# Altium PCB HCHO_Benchmark_B1.PcbDoc
Units mm, origin at the board's own origin, x right, y up, seen from the top; angles counter-clockwise.
Board outline 75.3 x 69.27 mm, 2 copper layers (Top Layer, Bottom Layer); 48 components, 50 nets, 181 pads, 116 vias.
Unrouted connection lines stored in the file: 2.
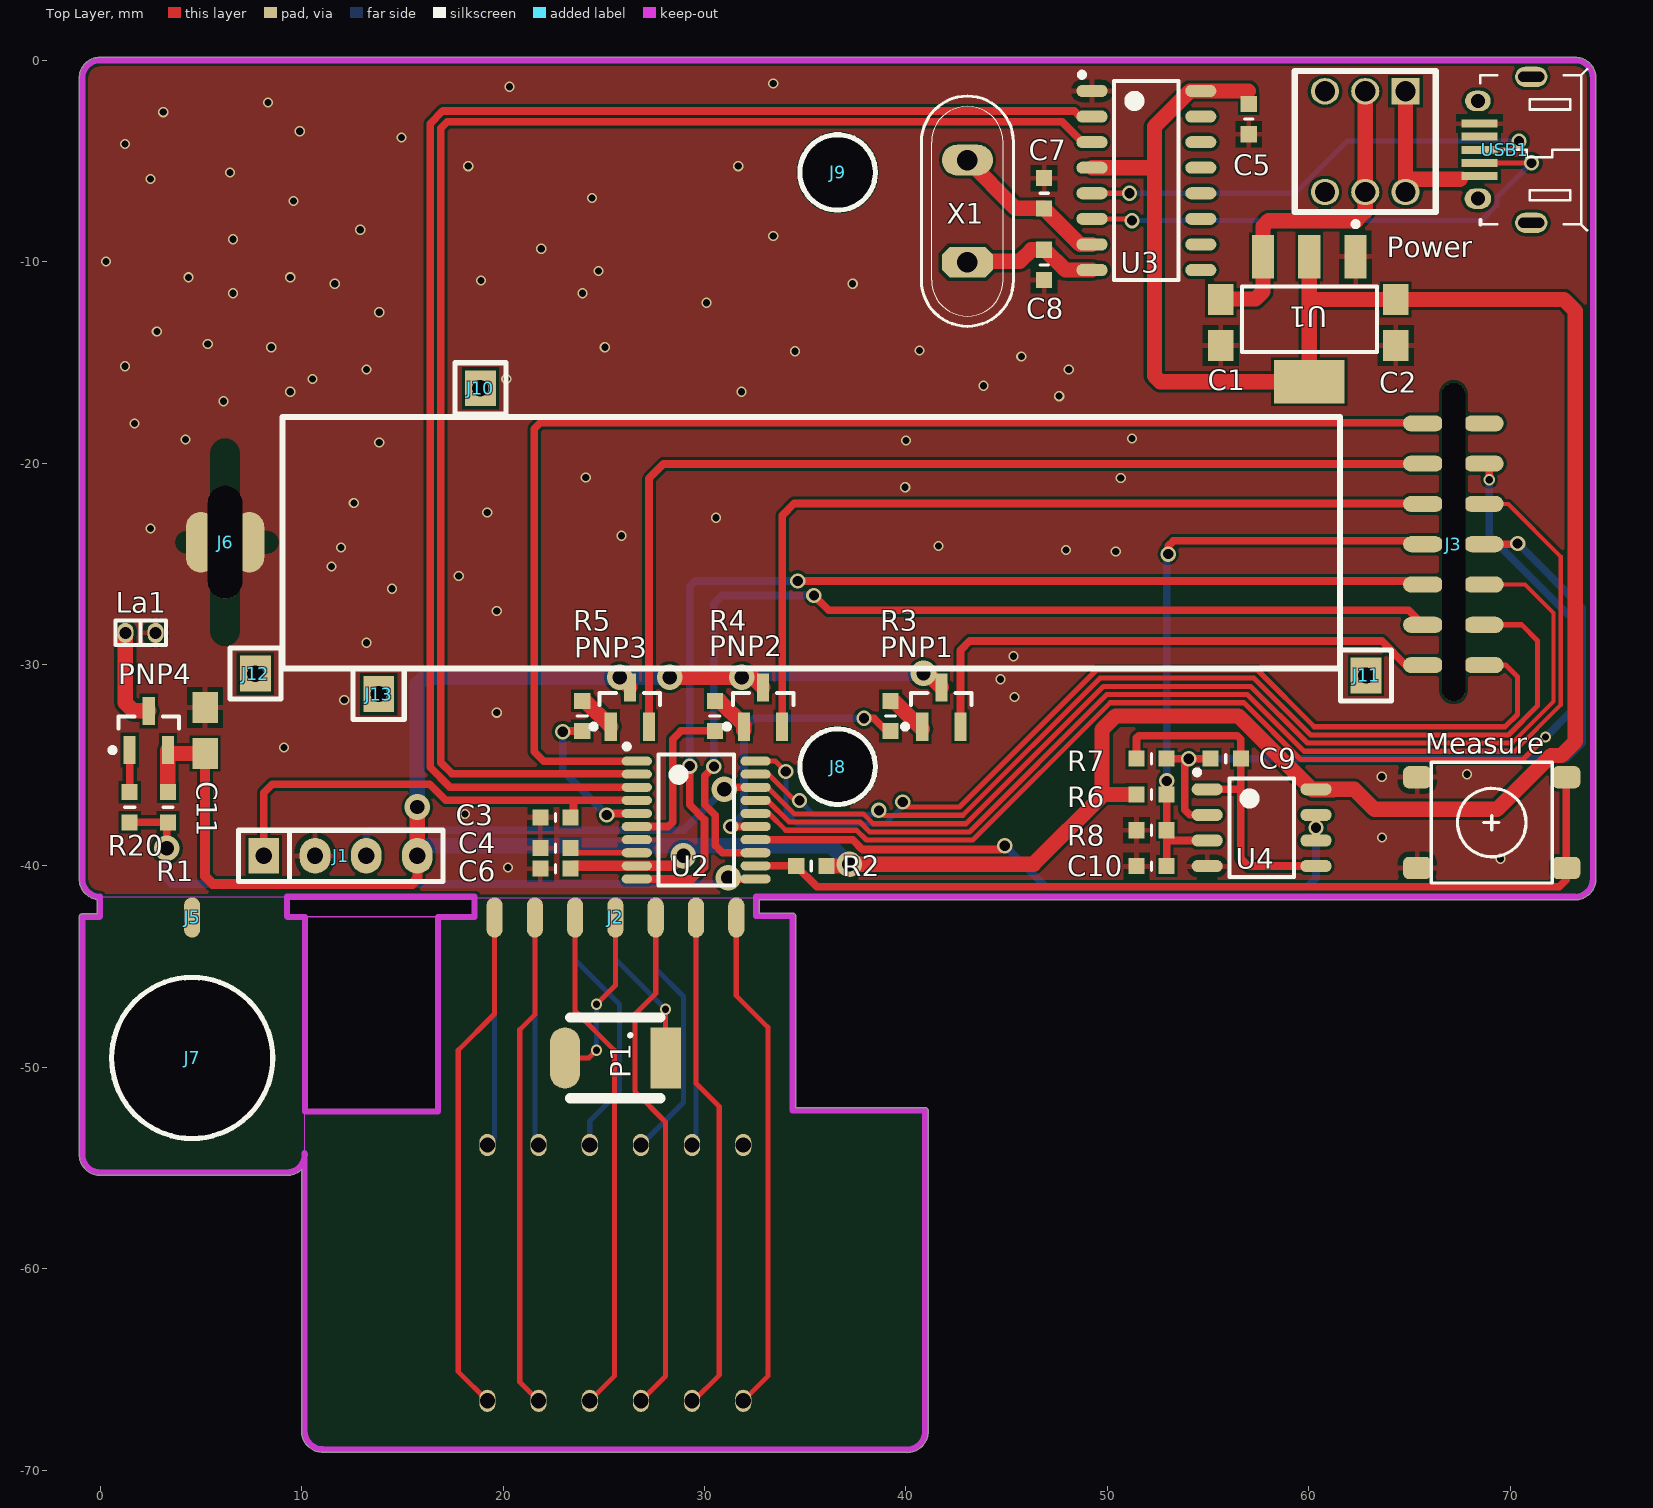
[diagram p0: Top Layer view]
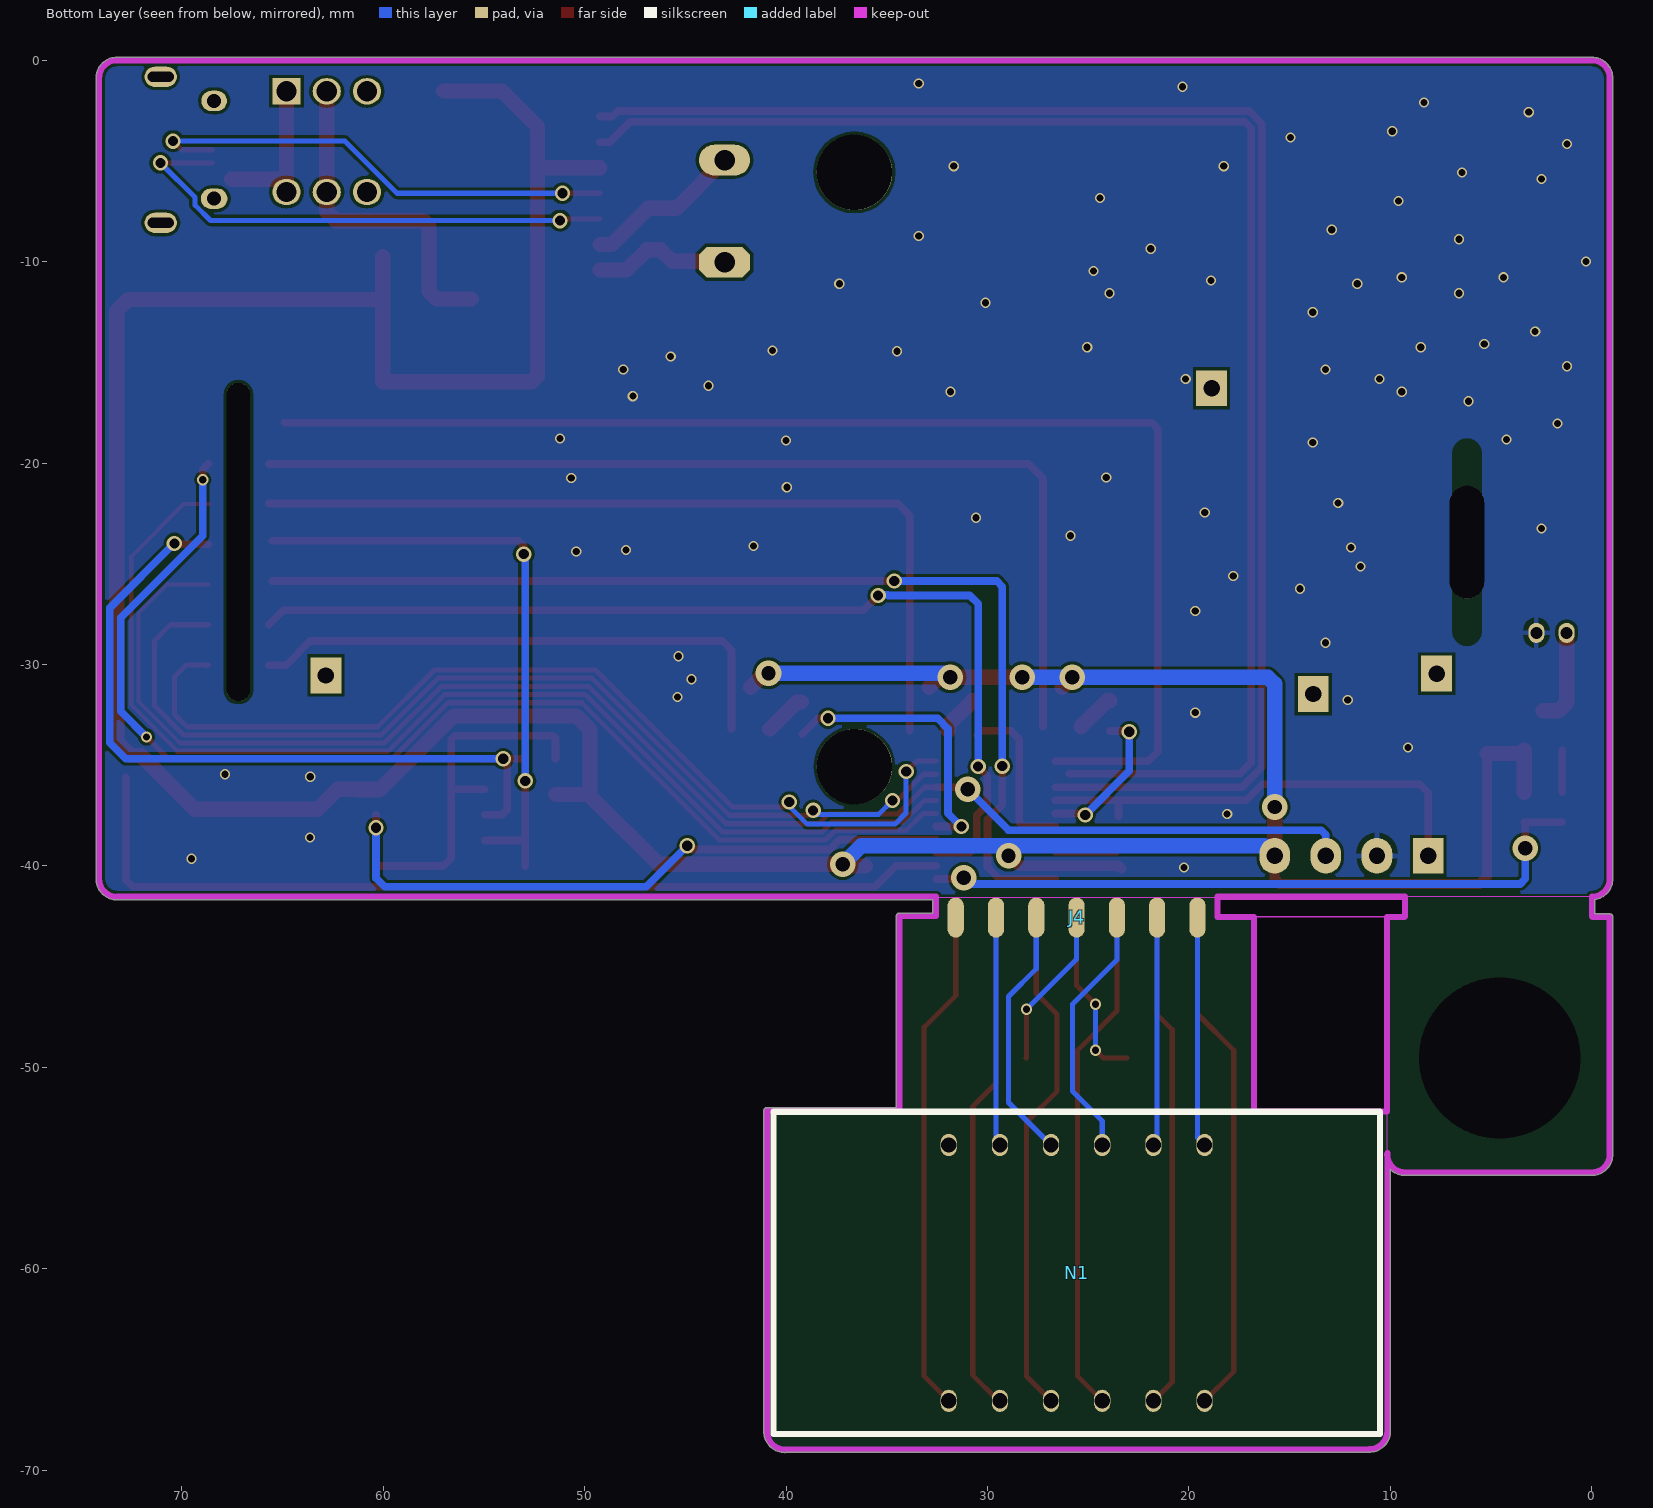
[diagram p1: Bottom Layer view, seen from below]

## Layer stack, top to bottom
Top Layer: signal copper 0.0356
Dielectric: dielectric 0.32, FR-4, Dk 4.8
Bottom Layer: signal copper 0.0356

## Board outline
-1.039,-54.322 -1.039,-42.532 cw(c-0.889,-42.532) -0.995,-42.425 cw(c-0.889,-42.531) -0.889,-42.381 -0.15,-42.381 -0.15,-41.668 cw(c0,-40.64) -1.039,-40.64 -1.039,-0.929 cw(c-0.889,-0.929) -1.038,-0.909 cw(c-0.889,-0.889) -1.039,-0.889 cw(c0,-0.889) 0,0.15 cw(c0,0) 0.02,0.149 cw(c0.04,0) 0.04,0.15 73.222,0.15 cw(c73.222,-0.889) 74.261,-0.889 cw(c74.111,-0.889) 74.261,-0.89 74.261,-40.64 cw(c73.222,-40.64) 73.222,-41.679 32.711,-41.679 32.711,-42.343 34.378,-42.343 cw(c34.378,-42.494) 34.528,-42.494 34.528,-51.995 40.954,-51.995 cw(c40.954,-52.145) 41.104,-52.145 41.104,-68.16 cw(c40.954,-68.16) 41.095,-68.213 cw(c40.064,-68.081) 40.064,-69.12 cw(c40.064,-68.97) 40.022,-69.115 11.041,-69.115 cw(c11.041,-68.964) 10.98,-69.102 cw(c11.041,-68.064) 10.002,-68.064 9.999,-55.063 cw(c9.269,-54.323) 9.269,-55.362 cw(c9.269,-55.212) 9.251,-55.361 0,-55.361 cw(c0,-54.322)
cut-out: 18.591,-41.529 18.591,-42.532 9.271,-42.532 9.271,-41.529
cut-out: 16.777,-42.531 16.777,-52.235 10.159,-52.235 10.159,-42.532 10.16,-42.531

## Design rules (kind name [scope] priority, off if disabled: settings)
Clearance "6mil Special" [(HasFootprint('FPC 0.5mm 4P') OR HasFootprint('FPC 0.5mm 16P') OR HasFootprint('QFN40P500X500X90_HS-41L'))] p1: gap=0.152
Clearance "8mil all" [All] p2: gap=0.152
ComponentClearance [All] p1: gap=-100 collisioncheckmode=3 verticalgap=0.254 showdistances=FALSE
Height [All] p1: minheight=0 maxheight=50.8 prefheight=12.7
HoleSize [All] p1: absolutevalues=TRUE maxlimit=1817.048 minlimit=0 maxpercent=80.000 minpercent=20.000
HoleToHoleClearance [All] p1: gap=0.203 allowstackedmicrovias=TRUE
MinimumSolderMaskSliver [All] p1: minsoldermaskwidth=0
PolygonConnect PolygonConnect_1 [isvia] p1: connectstyle=Direct reliefconductorwidth=0.254 reliefentries=4 polygonreliefangle="90 Angle" airgapwidth=0.254
PolygonConnect [All] p2: connectstyle=Relief reliefconductorwidth=0.254 reliefentries=4 polygonreliefangle="90 Angle" airgapwidth=0.254
RoutingCorners [All] p1: cornerstyle=45-Degree minsetback=0.254 maxsetback=2.54
RoutingVias [All] p1: holewidth=0.356 width=0.508 viastyle="Through Hole" minholewidth=0.356 minwidth=0.508 maxholewidth=2.54 maxwidth=5.08
SilkToSilkClearance [All] p1: silktosilkclearance=0
SilkToSolderMaskClearance [IsPad] p1: minsilkscreentomaskgap=0 clearancetoexposedcopper=TRUE
SolderMaskExpansion [All] p1: expansion=0.102
Width 20mil_Power [(InNet('EP_SUPPLY&VBAT') OR InNet('PSUPPLY') OR InNet('P_3.3V') OR InNet('PSUPPLYBAT') OR InNet('P_3.3V') OR InNet('P_5V'))] p1: maxlimit=1000 minlimit=0.203 preferedwidth=0.508
Width 8mil_Basic [All] p2: maxlimit=100 minlimit=0.203 preferedwidth=0.254
20 further rules are at their usual default settings.

## Components (designator, comment, footprint, x,y, rotation, side; value= is the part's Value field where it differs from the comment)
C1 "10uf" C0805 55.632,-13.019 r270 top
C2 "10uf" C0805 64.319,-13.019 r270 top
C3 "1uf" C0603 22.606,-37.592 r0 top
C4 "1uf" C0603 22.606,-39.116 r0 top
C5 "1uf" C0603 57.023,-2.921 r270 top
C6 "1uf" C0603 22.606,-40.132 r180 top
C7 "12pf" C0603 46.863,-6.604 r90 top
C8 "12pf" C0603 46.863,-10.16 r270 top
C9 "1uf" C0603 55.88,-34.671 r180 top
C10 "10uf" C0603 52.197,-40.005 r180 top
C11 "10uf" C0805 5.207,-33.274 r90 top
J1 "CON4" CON4 11.938,-39.497 r0 top
J2 "CON7_PCB" CON7_PCB 25.58,-42.555 r180 top
J3 "Con7x2_PCB" Con7x2_PCB 67.182,-23.927 r90 top
J4 "CON7_PCB" CON7_PCB 25.58,-42.555 r0 bottom
J5 "CON1_PCB" CON1_PCB 4.168,-42.555 r0 top
J6 "CON1X2_PCB" CON1X2_PCB 6.199,-23.927 r90 top
J7 "CON1" 6.6mm 4.572,-49.53 r0 top
J8 "CON1" 3.75mm 36.611,-35.07 r0 top
J9 "CON1" 3.75mm 36.611,-5.57 r0 top
J10 "CON1" CON1 18.878,-16.286 r0 top
J11 "CON1" CON1 62.847,-30.541 r0 top
J12 "CON1" CON1 7.707,-30.448 r0 top
J13 "CON1" CON1 13.828,-31.465 r0 top
La1 "Laser" Battry_Connector 1.253,-28.426 r0 top (schematic designator Laser1)
Measure "Patch_6x6x5" PATCH6X6X5 69.088,-37.846 r180 top
N1 "FJ4301BH" FJ4301BH 25.576,-60.201 r0 bottom
P1 "photodetector" BPW34 25.576,-49.532 r180 top
PNP1 "8550" SOT23-3 41.761,-32.109 r90 top
PNP2 "8550" SOT23-3 32.909,-32.109 r90 top
PNP3 "8550" SOT23-3 26.299,-32.109 r90 top
PNP4 "8550" SOT23-3 2.413,-33.274 r90 top
Power "SW_7x7mm" SW_7x7mm 62.806,-4.041 r180 top
R1 "10K" R0603 3.363,-37.084 r90 top
R2 "10K" R0603 35.306,-40.005 r0 top
R3 "10K" R0603 39.236,-32.553 r270 top
R4 "10K" R0603 30.518,-32.553 r270 top
R5 "10K" R0603 23.932,-32.553 r270 top
R6 "4K7" R0603 52.197,-36.449 r180 top
R7 "10M" R0603 52.197,-34.671 r180 top
R8 "1K" R0603 52.197,-38.227 r0 top
R20 "1K" R0603 1.463,-37.084 r270 top
U1 "1117-3.3" SOT223 60.029,-12.86 r180 top
U2 "STM8S003F3P6" STM8S003F3P6 29.591,-37.719 r0 top
U3 "CH340G" SOP-16 51.943,-5.969 r0 top
U4 "LMV358" LMV358_SOP 57.658,-38.1 r0 top
USB1 "MicroUSB" MicroUSB 69.723,-4.445 r180 top
X1 "12MHZ" HC-49 43.053,-7.493 r90 top

## Footprints (in the part's own frame and the unit in brackets; to place one, negate y for a bottom-side part, rotate by r counter-clockwise, add the part's x,y. Pads: shape width x height; smd on the part's side, far side on the other; paste and mask are expansions set on the pad)
3.75mm [mm]
  round 3.75 hole 3.75 unplated: ""(0,0)
6.6mm [mm]
  round 6.6 hole 8 unplated: ""(0,0)
Battry_Connector [mm]
  oval 0.8x1 hole 0.6: 1(0,0) 2(1.5,0)
  silkscreen extent -0.5,-0.61 2.02,0.61
BPW34 [mm]
  rect 1.5x3.048 smd: A(-2.5,0)
  oval 1.5x3.048 smd: C(2.5,0)
  silkscreen extent -2.25,-2 2.25,2
C0603 [mm]
  rect 0.8x0.8 smd: 1(-0.75,0) 2(0.75,0)
  silkscreen extent 0,-0.2 0,0.2, body extent -0.8,-0.4 0.8,0.4, height 0.8
C0805 [mil]
  rect 60x50 smd: 1(-45,0) 2(45,0)
  body extent -52,-25 55,25, height 31
CON1 [mil]
  rect 60x70 hole 32: 1(0,0)
  silkscreen extent -50,-50 50,50, body extent -51,-50 52,50, height 295
CON1_PCB [mm]
  oval 0.8x2 smd: 1(0.397,0)
CON1X2_PCB [mm]
  oval 5.6x1.7 hole 1.7 slot 5.6 at 0 deg unplated: 0(0,0)
  oval 3x1.5 smd: 1(0,1.2) 2(0,-1.2)
CON4 [mil]
  rect 60x70 hole 32: 1(-150,0)
  oval 60x70 hole 32: 2(-50,0) 3(50,0) 4(150,0)
  silkscreen extent -200,-50 200,50, body extent -201,-50 199,50, height 295
CON7_PCB [mm]
  oval 0.8x2 smd: 1(-6,0) 2(-4,0) 3(-2,0) 4(0,0) 5(2,0) 6(4,0) 7(6,0)
Con7x2_PCB [mm]
  oval 0.8x2 smd: 1(-6.1,1.5) 2(-4.1,1.5) 3(-2.1,1.5) 4(-0.1,1.5) 5(1.9,1.5) 6(3.9,1.5) 7(5.9,1.5) 8(5.9,-1.5) 9(3.9,-1.5) 10(1.9,-1.5) 11(-0.1,-1.5) 12(-2.1,-1.5) 13(-4.1,-1.5) 14(-6.1,-1.5)
  oval 15.8x1.15 hole 1.15 slot 15.8 at 0 deg unplated: ""(0.003,-0.012)
FJ4301BH [mm]
  oval 0.8x1.1 hole 0.75: 1(-6.35,-6.35) 2(-3.81,-6.35) 3(-1.27,-6.35) 4(1.27,-6.35) 5(3.81,-6.35) 6(6.35,-6.35) 7(6.35,6.35) 8(3.81,6.35) 9(1.27,6.35) 10(-1.27,6.35) 11(-3.81,6.35) 12(-6.35,6.35)
  silkscreen extent -15.05,-8 15.05,8, body extent -15.05,-8 15.05,8, height 15.1
HC-49 [mil]
  oct 60x100 hole 40: 1(-100,0)
  oval 60x100 hole 40: 2(100,0)
  silkscreen extent -225,-90 225,90, body extent -224,-91 226,89, height 134
LMV358_SOP [mm] "TSOP, 8-Leads, Body 3.00x3.00mm, Pitch 0.65mm, IPC Medium Density"
  oval 1.55x0.6 smd: 1(-2.7,1.905) 2(-2.7,0.635) 3(-2.7,-0.635) 4(-2.7,-1.905) 5(2.7,-1.905) 6(2.7,-0.635) 7(2.7,0.635) 8(2.7,1.905)
  silkscreen extent -3.32,-2.45 1.6,2.87, body extent -1.95,-2.47 1.93,2.46, height 1.1
MicroUSB [mm]
  oval 1.6x1 hole 0.5 slot 1.3 at 0 deg unplated: 0(-1.325,3.625) 0(-1.325,-3.625)
  rect 1.8x0.4 smd: 1(1.25,1.3) 2(1.25,0.65) 3(1.25,0) 4(1.25,-0.65) 5(1.25,-1.3)
  oval 1.321x1.016 hole 0.7 unplated: ""(1.325,2.425)
  oval 1.27x1.016 hole 0.7 unplated: ""(1.325,-2.425)
  silkscreen extent -4.1,-4 1.2,4, body extent -3.62,-3.96 1.81,4.02, height 2.99
PATCH6X6X5 [mm]
  rrect50% 1.4x1.1 smd: 1(-3.7,2.25) 2(3.7,2.25) 3(3.7,-2.25) 4(-3.7,-2.25)
  silkscreen extent -3,-3 3,3, body extent -4.13,-3 4.13,3, height 5
R0603 [mm]
  rect 0.8x0.8 smd: 1(-0.75,0) 2(0.75,0)
  silkscreen extent 0,-0.25 0,0.25, body extent -0.8,-0.4 0.8,0.4, height 0.5
SOP-16 [mm]
  oval 1.55x0.6 smd: 1(-2.7,4.445) 2(-2.7,3.175) 3(-2.7,1.905) 4(-2.7,0.635) 5(-2.7,-0.635) 6(-2.7,-1.905) 7(-2.7,-3.175) 8(-2.7,-4.445) 9(2.7,-4.445) 10(2.7,-3.175) 11(2.7,-1.905) 12(2.7,-0.635) 13(2.7,0.635) 14(2.7,1.905) 15(2.7,3.175) 16(2.7,4.445)
  silkscreen extent -3.32,-4.95 1.6,5.37, body extent -1.91,-4.95 1.91,4.95, height 1
SOT23-3 [mm]
  rect 1.4x0.6 smd: 1(-0.975,0.95) 2(-0.975,-0.95) 3(0.975,0)
  silkscreen extent -1.1,-1.5 0.7,1.92, body extent -0.7,-1.5 0.7,1.5, height 1
SOT223 [mm]
  rect 1.1x2.15 smd: 1(-2.3,-3.1) 2(0,-3.1) 3(2.3,-3.1)
  rect 3.5x2.15 smd: 4(0,3.1)
  silkscreen extent -3.35,-4.85 3.35,1.63, body extent -3.3,-3.2 3.3,3.1, height 1.7
STM8S003F3P6 [mm]
  oval 1.5x0.45 smd: 1(-2.95,2.925) 2(-2.95,2.275) 3(-2.95,1.625) 4(-2.95,0.975) 5(-2.95,0.325) 6(-2.95,-0.325) 7(-2.95,-0.975) 8(-2.95,-1.625) 9(-2.95,-2.275) 10(-2.95,-2.925) 11(2.95,-2.925) 12(2.95,-2.275) 13(2.95,-1.625) 14(2.95,-0.975) 15(2.95,-0.325) 16(2.95,0.325) 17(2.95,0.975) 18(2.95,1.625) 19(2.95,2.275) 20(2.95,2.925)
  silkscreen extent -3.57,-3.25 1.88,3.77, body extent -2.22,-3.25 2.2,3.24, height 1.2
SW_7x7mm [mm]
  rect 1.4x1.3 hole 1: 1(-2,-2.5)
  oval 1.4x1.3 hole 1: 2(0,-2.5) 3(2,-2.5) 4(2,2.5) 5(0,2.5) 6(-2,2.5)
  silkscreen extent -3.5,-3.5 3.5,3.5, body extent -3.54,-3.49 3.51,3.52, height 12.5

## Part data
C1 C2 C3 C4 C5 C6 C7 C8 C9 C10 C11: library part C
J3: library part CON7x2_PCB
PNP1 PNP2 PNP3 PNP4: library part PNP
R1 R2 R3 R4 R5 R6 R7 R8 R20: library part R
U1: library part 1117
X1: library part CRYSTAL

## Via types
v1: diameter 0.508, hole 0.356, Top Layer to Bottom Layer, 79 vias
v2: diameter 0.762, hole 0.508, Top Layer to Bottom Layer, 22 vias
v3: diameter 1.27, hole 0.711, Top Layer to Bottom Layer, 10 vias
v4: diameter 0.559, hole 0.356, Top Layer to Bottom Layer, 5 vias

## Nets (pads, with @x,y where several pads share a name; then routed paths per layer and width w, separated by ;. In a path a pad name is that pad's centre, name@x,y a point inside that pad or via, vN(x,y) a via of type N, cw(c..) or ccw(c..) an arc to the next point about the centre after c; other vN are vias at no path point)
-INA: C9.2 J3.11 R7.1 U4.2 | length 39.1
  Top Layer w0.381: R7.1 v2@53.848,-34.671 ; v2(54.043,-34.679) v2@53.84,-34.679 ; U4.2 54.102,-37.465 53.84,-37.203 v2@53.84,-34.679 ; C9.2 v2@53.848,-34.671 ; J3.11 70.355,-24.027 v2@70.37,-24.042 ; v2(70.37,-23.988) v2@70.37,-24.042 ; v2@70.47,-24.142 v2@70.37,-24.042 ; v2@53.84,-34.679 v2@53.848,-34.671
  Bottom Layer w0.381: v2(54.043,-34.679) 72.783,-34.679 73.574,-33.888 73.574,-27.193 v2(70.37,-23.988)
C_LASER: R1.1 R20.2 U2.11 | length 34.2
  Top Layer w0.381: R20.2 R1.1 3.302,-37.895 v3(3.302,-39.116) ; v3(31.182,-40.592) 31.234,-40.644 U2.11
  Bottom Layer w0.381: v3(3.302,-39.116) 3.302,-40.64 3.556,-40.894 30.879,-40.894 v3(31.182,-40.592)
GND: C1.2 C2.2 C3.1 C4.1 C5.2 C6.2 C7.2 C8.2 C10.2 C11.2 J1.2 La1.2 Measure.3 Measure.4 R8.1 U1.1 U2.7 U3.1 U4.4 USB1.5
  other v1: 20.244,-40.079 69.517,-39.642 63.636,-38.587 18.104,-37.415 63.627,-35.572 67.861,-35.443 9.123,-34.123 19.691,-32.388 12.12,-31.757 45.386,-31.616 44.704,-30.734 45.339,-29.591 13.224,-28.918 19.691,-27.341 14.486,-26.237 17.798,-25.605 11.489,-25.132 50.419,-24.384 47.955,-24.313 11.962,-24.186 41.622,-24.112 25.879,-23.602 2.498,-23.239 30.574,-22.712 19.218,-22.451 12.593,-21.977 39.964,-21.197 50.669,-20.744 24.108,-20.716 13.855,-18.98 40.01,-18.876 4.233,-18.823 51.222,-18.784 1.709,-18.034 6.126,-16.93 47.609,-16.675 9.438,-16.457 31.837,-16.456 43.856,-16.159 10.543,-15.826 20.165,-15.826 13.224,-15.352 48.084,-15.352 1.236,-15.195 45.732,-14.705 34.499,-14.449 40.671,-14.406 8.492,-14.248 25.055,-14.248 5.337,-14.091 2.813,-13.46 13.855,-12.513 30.102,-12.04 6.599,-11.567 23.95,-11.567 11.647,-11.094 37.358,-11.094 18.903,-10.936 4.391,-10.778 9.438,-10.778 24.739,-10.463 0.29,-9.989 21.9,-9.358 6.599,-8.885 33.415,-8.727 12.909,-8.412 9.596,-6.992 24.424,-6.835 2.498,-5.888 6.441,-5.573 18.272,-5.257 31.68,-5.257 1.236,-4.153 14.959,-3.838 9.912,-3.522 3.129,-2.576 8.334,-2.102 20.322,-1.314 33.415,-1.156
HCHO_ADC: U2.14 U4.6 U4.7 | length 32.9
  Top Layer w0.381: U2.14 37.354,-38.694 37.845,-39.185 44.713,-39.185 v2(44.904,-38.995) ; U4.6 v2(60.358,-38.1) U4.7
  Bottom Layer w0.381: v2(44.904,-38.995) 46.945,-41.036 59.929,-41.036 60.358,-40.607 v2(60.358,-38.1)
N_A: J3.2 U2.13 | length 50.7
  Top Layer w0.381: v2@30.468,-35.14 v2(30.468,-35.063) 30.01,-35.521 30.01,-36.953 30.533,-37.476 30.533,-38.98 30.897,-39.344 U2.13 ; v2(35.434,-26.573) 36.167,-27.305 64.96,-27.305 J3.2
  Bottom Layer w0.381: v2@30.507,-35.024 v2(30.468,-35.063) 30.468,-26.982 30.877,-26.573 34.929,-26.573 34.962,-26.54 35.401,-26.54 v2(35.434,-26.573)
N_B: J3.7 U2.1 | length 64.8
  Top Layer w0.381: U2.1 22.024,-34.794 21.553,-34.323 21.553,-18.296 21.847,-18.002 J3.7@64.903,-18.002
N_C: J3.10 U2.17 | length 57.8
  Top Layer w0.203: J3.10 69.906,-22.027 72.511,-24.632 72.511,-32.01 70.216,-34.305
  Top Layer w0.254: U2.17 33.133,-36.744 34.207,-37.818 37.717,-37.818 38.208,-38.309 43.153,-38.309 49.972,-31.49 56.951,-31.49 59.766,-34.305 70.216,-34.305
N_COM1: R3.2 U2.15 | length 14.2
  Top Layer w0.381: v2(31.299,-38.044) U2.15 ; v2(37.918,-32.664) 38.415,-32.664 R3.2@39.207,-33.455
  Bottom Layer w0.381: v2(31.299,-38.044) 31.966,-37.378 31.966,-33.18 32.482,-32.664 v2(37.918,-32.664)
N_COM2: R4.2 U2.6 | length 8.3
  Top Layer w0.381: U2.6 28.209,-38.044 28.428,-37.825 28.428,-33.704 28.84,-33.292 30.307,-33.292 R4.2@30.518,-33.504
N_COM3: R5.2 U2.5 | length 7.6
  Top Layer w0.381: v2(22.96,-33.336) 22.993,-33.303 R5.2 ; v2(25.148,-37.468) 25.222,-37.394 U2.5
  Bottom Layer w0.381: v2(22.96,-33.336) 22.96,-35.279 v2(25.148,-37.468) v2@25.148,-37.42
N_D: J3.13 U2.19 | length 50.7
  Top Layer w0.254: U2.19 33.178,-35.444 34.594,-36.859 34.613,-36.859 v2(34.721,-36.751) ; v2(38.661,-37.242) 38.915,-37.496 39.694,-37.496 39.706,-37.484 42.829,-37.484 49.636,-30.677 57.288,-30.677 60.103,-33.492 69.915,-33.492 71.36,-32.047 71.36,-28.815 70.572,-28.027 J3.13
  Bottom Layer w0.254: v2(34.721,-36.751) 35.407,-37.437 38.466,-37.437 v2(38.661,-37.242)
N_DP: J1.3 J3.12 U2.18 | length 75
  Top Layer w0.203: J3.12 70.731,-26.027 72.155,-27.451 72.155,-31.827 70.084,-33.898
  Top Layer w0.254: U2.18 33.13,-36.094 34.448,-37.411 37.885,-37.411 38.377,-37.903 42.985,-37.903 49.804,-31.084 57.12,-31.084 59.934,-33.898 70.084,-33.898
  Top Layer w0.381: v3(30.988,-36.195) 31.089,-36.094 U2.18
  Bottom Layer w0.381: J1.3 13.208,-38.457 13.439,-38.226 28.957,-38.226 v3(30.988,-36.195)
N_E: J3.14 U2.20 | length 49
  Top Layer w0.254: U2.20 33.52,-34.794 v2(34.038,-35.311) ; v2(39.84,-36.824) 40.094,-37.078 42.661,-37.078 49.467,-30.271 57.456,-30.271 60.271,-33.086 69.747,-33.086 70.358,-32.475 70.358,-30.607 69.778,-30.027 J3.14
  Bottom Layer w0.254: v2(34.038,-35.311) 34.049,-35.323 34.049,-37.375 34.6,-37.926 38.946,-37.926 39.84,-37.031 v2(39.84,-36.824)
N_F: J3.3 U2.10 | length 54.2
  Top Layer w0.381: U2.10 29.415,-40.644 30,-40.06 30,-37.697 29.266,-36.963 v2(29.266,-35.043) ; v2(34.629,-25.849) J3.3@65.504,-25.849
  Bottom Layer w0.381: v2(29.266,-35.043) 29.266,-26.131 29.548,-25.849 v2(34.629,-25.849)
N_G: J3.9 U2.16 | length 60.1
  Top Layer w0.254: U2.16 33.208,-37.394 34.038,-38.224 37.549,-38.224 38.04,-38.715 43.322,-38.715 50.141,-31.897 56.783,-31.897 59.598,-34.711 70.644,-34.711 v4(71.755,-33.6)
  Top Layer w0.381: J3.9 68.961,-20.306 v4(68.961,-20.828)
  Bottom Layer w0.381: v4(68.961,-20.828) 68.961,-23.603 73.041,-27.683 73.041,-32.315 v4(71.755,-33.6)
NetC1_1: C1.1 Power.2 Power.5 U1.3 | length 16.8
  Top Layer w0.762: C1.1@55.632,-11.85 57.357,-11.85 57.729,-11.478 U1.3 57.729,-8.241 58.005,-7.965 62.354,-7.965 62.806,-7.513 Power.5 Power.2
NetC4_2: C4.2 U2.8 | length 3.4
  Top Layer w0.254: C4.2 23.584,-39.344 U2.8
NetC7_1: C7.1 U3.7 X1.2 | length 7.9
  Top Layer w0.762: X1.2 45.454,-7.354 C7.1 48.653,-9.144 U3.7
NetC8_1: C8.1 U3.8 X1.1 | length 6.9
  Top Layer w0.762: X1.1 43.109,-9.977 45.661,-9.977 46.228,-9.41 C8.1 46.917,-9.41 47.921,-10.414 U3.8
NetJ2_1: J2.1 N1.7 | length 25.2
  Top Layer w0.254: J2.1 31.58,-46.439 33.147,-48.006 33.147,-65.33 N1.7
NetJ2_2: J2.2 N1.8 | length 25.1
  Top Layer w0.254: N1.8 29.461,-66.551 30.734,-65.278 30.734,-51.943 29.58,-50.789 J2.2
NetJ2_3: J2.3 N1.9 | length 25.6
  Top Layer w0.254: N1.9 28.067,-65.33 28.067,-52.705 26.543,-51.181 26.543,-47.371 27.58,-46.334 J2.3
NetJ2_4: J2.4 P1.C | length 8.7
  Top Layer w0.254: P1.C 24.255,-49.532 v4(24.638,-49.149) ; v4(24.638,-46.863) 25.58,-45.921 J2.4
  Bottom Layer w0.254: v4(24.638,-49.149) v4(24.638,-46.863)
NetJ2_5: J2.5 N1.10 | length 25.3
  Top Layer w0.254: J2.5 23.58,-47.202 25.527,-49.149 25.527,-65.33 N1.10
NetJ2_6: J2.6 N1.11 | length 24.7
  Top Layer w0.254: J2.6 21.58,-47.381 20.828,-48.133 20.828,-65.613 N1.11
NetJ2_7: J2.7 N1.12 | length 25.3
  Top Layer w0.254: N1.12 17.78,-65.105 17.78,-49.149 19.58,-47.349 J2.7
NetJ3_1: J3.1 PNP1.2 | length 27.6
  Top Layer w0.381: PNP1.2@42.711,-33.203 42.711,-29.298 43.18,-28.829 63.627,-28.829 64.825,-30.027 J3.1
NetJ3_5: J3.5 PNP2.2 | length 42.7
  Top Layer w0.381: PNP2.2@33.859,-33.276 33.859,-22.602 34.459,-22.002 J3.5@65.682,-22.002
NetJ3_6: J3.6 PNP3.2 | length 51.1
  Top Layer w0.381: PNP3.2 27.249,-20.761 27.968,-20.042 J3.6@65.682,-20.042
NetJ4_1: J4.1 N1.1 | length 11.4
  Bottom Layer w0.254: N1.1 19.58,-53.497 J4.1
NetJ4_2: J4.2 N1.2 | length 11.4
  Bottom Layer w0.254: J4.2 21.58,-53.665 N1.2
NetJ4_3: J4.3 N1.3 | length 12.8
  Bottom Layer w0.254: J4.3 23.58,-44.662 25.781,-46.863 25.781,-51.181 24.306,-52.656 N1.3
NetJ4_4: J4.4 P1.A | length 8
  Top Layer w0.254: v4(28.067,-47.117) 28.067,-49.523 P1.A
  Bottom Layer w0.254: J4.4 25.58,-44.63 v4(28.067,-47.117)
NetJ4_5: J4.5 N1.4 | length 12.7
  Bottom Layer w0.254: N1.4 28.956,-51.741 28.956,-46.482 27.58,-45.106 J4.5
NetJ4_6: J4.6 N1.5 | length 11.4
  Bottom Layer w0.254: N1.5 29.58,-53.657 J4.6
NetLA1_1: La1.1 PNP4.3 | length 4.8
  Top Layer w0.762: La1.1 1.253,-31.9 1.652,-32.299 PNP4.3
NetPNP1_1: PNP1.1 R3.1 | length 2.1
  Top Layer w0.762: R3.1@39.236,-31.857 39.465,-31.857 PNP1.1@40.811,-33.203
NetPNP2_1: PNP2.1 R4.1 | length 2
  Top Layer w0.762: R4.1@30.72,-31.803 30.758,-31.803 31.959,-33.004 PNP2.1@31.959,-33.276
NetPNP3_1: PNP3.1 R5.1 | length 1.9
  Top Layer w0.762: R5.1 24.068,-31.803 PNP3.1
NetPNP4_1: PNP4.1 R20.1 | length 2.1
  Top Layer w0.381: R20.1 PNP4.1
NetPower_1: Power.1 Power.6 USB1.1 | length 7.7
  Top Layer w0.762: Power.6 Power.6@64.806,-5.915 ; Power.1 Power.6@64.806,-5.915 ; 67.53,-5.892 67.507,-5.915 Power.6@64.806,-5.915
NRESET: C3.2 J1.1 U2.4 | length 22.9
  Top Layer w0.381: J1.1 8.128,-36.358 8.546,-35.94 16.358,-35.94 17.162,-36.744 U2.4 ; C3.2@23.495,-37.526 23.495,-36.77
OUT1: C9.1 R7.2 U4.1 U4.5 | length 17.8
  Top Layer w0.381: R7.2 51.447,-33.643 51.562,-33.528 56.457,-33.528 56.63,-33.701 C9.1 56.63,-36.195 ; U4.1 56.63,-36.195 ; U4.5 57.023,-40.005 56.63,-39.612 56.63,-36.195
P_3.3V: C2.1 C5.1 C6.1 C11.1 J1.4 PNP1.3 PNP2.3 PNP3.3 PNP4.2 R1.2 R2.2 R6.2 U1.2 U1.4 U2.9 U3.4 U3.16 U4.8 | length 208.1
  Top Layer w0.508: C11.1 5.207,-40.513 5.588,-40.894 15.494,-40.894 15.748,-40.64 J1.4 ; C6.1 23.494,-39.994 U2.9 28.459,-39.994 v3(28.956,-39.497) v3@28.956,-39.878
  Top Layer w0.762: R1.2 PNP4.2 3.531,-34.417 C11.1 ; J1.4 v3(15.748,-37.073) ; v3(25.798,-30.633) PNP3.3 ; v3(28.271,-30.633) v3(31.849,-30.633) ; v3@31.876,-30.633 v3(31.849,-30.633) ; PNP2.3 32.409,-30.633 v3(31.849,-30.633) ; R2.2 37.091,-40.005 v3(37.186,-39.909) 46.347,-39.909 49.807,-36.449 ; v3(40.876,-30.43) 41.057,-30.43 PNP1.3 ; U3.4 52.315,-5.334 52.34,-5.359 ; R6.2 49.739,-36.449 49.739,-33.232 50.414,-32.557 56.509,-32.557 60.184,-36.232 61.214,-36.232 ; 57.011,-1.524 U3.16 54.102,-1.524 52.34,-3.286 52.34,-5.359 ; U4.8 62.265,-36.195 63.262,-37.192 69.349,-37.192 72.028,-34.513 72.548,-34.513 73.24,-33.821 73.24,-12.449 72.667,-11.876 C2.1 60.029,-11.876 U1.2 U1.4 52.623,-15.96 52.34,-15.677 52.34,-5.359
  Bottom Layer w0.762: J1.4 16.256,-38.989 29.464,-38.989 ; v3(15.748,-37.073) 15.748,-30.96 16.075,-30.633 v3(25.798,-30.633) v3(28.271,-30.633) ; v3(28.956,-39.497) 29.464,-38.989 ; v3(31.849,-30.633) 32.053,-30.43 v3(40.876,-30.43) ; v3(37.186,-39.909) 36.266,-38.989 29.464,-38.989
S_UD+: U3.5 USB1.3 | length 24.4
  Top Layer w0.254: U3.5 v2(51.102,-6.604) ; USB1.3 70.006,-4.445 v2(70.438,-4.013)
  Bottom Layer w0.254: v2(51.102,-6.604) 59.316,-6.604 61.907,-4.013 v2(70.438,-4.013)
S_UD-: U3.6 USB1.2 | length 25.9
  Top Layer w0.254: U3.6 51.139,-7.874 v2(51.226,-7.961) ; USB1.2 v2(71.062,-5.095)
  Bottom Layer w0.254: v2(51.226,-7.961) 68.573,-7.961 69.338,-7.196 69.338,-6.819 v2(71.062,-5.095)
TRRIGLE: Measure.1 Measure.2 R2.1 U2.12 | length 45.9
  Top Layer w0.381: U2.12 34.545,-39.994 R2.1 35.587,-41.036 72.437,-41.036 72.788,-40.685 Measure.1 72.788,-35.596
UART_RXD: U2.3 U3.2 | length 75.9
  Top Layer w0.381: U2.3 17.369,-36.094 16.379,-35.105 16.379,-3.152 17.017,-2.515 48.362,-2.515 48.641,-2.794 U3.2
UART_TXD: U2.2 U3.3 | length 73.6
  Top Layer w0.381: U2.2@25.94,-35.422 17.47,-35.422 16.921,-34.873 16.913,-34.873 16.913,-3.373 17.238,-3.048 47.752,-3.048 48.768,-4.064 U3.3
V0.58: C10.1 J3.4 R6.1 R8.2 U4.3 | length 30.5
  Top Layer w0.381: C10.1 52.947,-38.735 ; v2(52.947,-35.778) R6.1 R8.2 52.947,-38.735 ; v2(53.024,-24.516) 53.024,-24.115 53.29,-23.849 J3.4@65.504,-23.849 ; U4.3 52.947,-38.735
  Bottom Layer w0.381: v2(52.947,-35.778) 52.947,-24.593 v2(53.024,-24.516)
pads on no net: J3. J3.8 J4.7 J5.1 J6.0 J6.1 J6.2 J7. J8. J9. J10.1 J11.1 J12.1 J13.1 N1.6 Power.3 Power.4 U3.9 U3.10 U3.11 U3.12 U3.13 U3.14 U3.15 USB1. USB1.0 USB1.4
copper on no net: | length 0.8
  Top Layer w0.254: 68.682,-30.027 68.719,-30.064
  Top Layer w0.381: 68.682,-24.027 69.385,-24.027

## Polygon pours and split planes (outlines as drawn)
GND on Top Layer "Bottom Layer-No Net" (solid, remove dead copper, pour order 2): -7.161,5.079 75.61,5.079 75.783,5.252 75.783,-41.625 75.955,-41.798 -6.815,-41.798 -7.161,-41.451
GND on Bottom Layer "Bottom Layer-No Net" (solid, remove dead copper, pour order 4): -4.184,3.128 -4.031,3.281 74.974,3.281 74.974,-43.946 75.253,-44.225 74.974,-44.504 -4.668,-44.504

## Keep-outs
Keep-Out Layer:
  lines w0.01: 0,-41.529 10.425,-41.529 ; 10.152,-54.253 10.152,-52.196 ; 18.593,-41.567 32.572,-41.567
  lines w0.3: -0.889,-42.532 -0.889,-54.322 ccw(c0,-54.322) 0,-55.211 9.261,-55.211 ; -0.889,-42.531 -0.032,-42.531 0,-42.499 0,-41.529 cw(c0,-40.64) -0.889,-40.64 -0.889,-0.929 ; -0.889,-0.889 cw(c0,-0.889) 0,0 ; 0.04,0 73.222,0 cw(c73.222,-0.889) 74.111,-0.889 74.111,-40.64 cw(c73.222,-40.64) 73.222,-41.529 32.561,-41.529 32.561,-42.494 ; 9.269,-55.212 ccw(c9.269,-54.323) 10.158,-54.323 ; 9.271,-42.499 9.271,-41.529 18.591,-41.529 ; 9.303,-42.531 10.16,-42.531 10.16,-52.196 16.777,-52.196 16.777,-42.532 18.591,-42.532 18.591,-41.567 ; 10.149,-54.253 10.152,-68.064 ccw(c11.041,-68.064) 11.041,-68.953 ; 11.041,-68.964 40.064,-68.964 ; 32.563,-42.494 34.378,-42.494 34.378,-52.145 40.954,-52.145 40.954,-68.16 ; 40.064,-68.97 ccw(c40.064,-68.081) 40.953,-68.081

## Other copper
Top Layer:
  rectangle net NetPower_1: 67.353,-5.962 67.699,-5.522

## Silkscreen, mask and mechanical layers (free items; w line width, h text height)
Top Overlay:
  circle w0.254: c36.611,-35.07 r1.875
  circle w0.254: c36.611,-5.57 r1.875
  circle w0.254: c4.566,-49.532 r4
  lines w0.3: 26.307,-48.421 26.338,-48.39 ; 9.052,-30.2 61.552,-30.2 61.552,-17.7 9.052,-17.7 9.052,-30.2

## Text inside footprints (layer, text, board x,y; h text height)
U3: Mechanical 15 "1" at 52.393,-6.133 h0.75 r90
U4: Mechanical 15 "1" at 58.108,-38.264 h0.75 r90